# Altium PCB PCB_otel-RFID_2024-05-21.pcbdoc
Units mm, origin at the board's own origin, x right, y up, seen from the top; angles counter-clockwise.
Board outline 77.65 x 69.65 mm, 2 copper layers (Top Layer, Bottom Layer); 33 components, 23 nets, 102 pads, 9 vias.
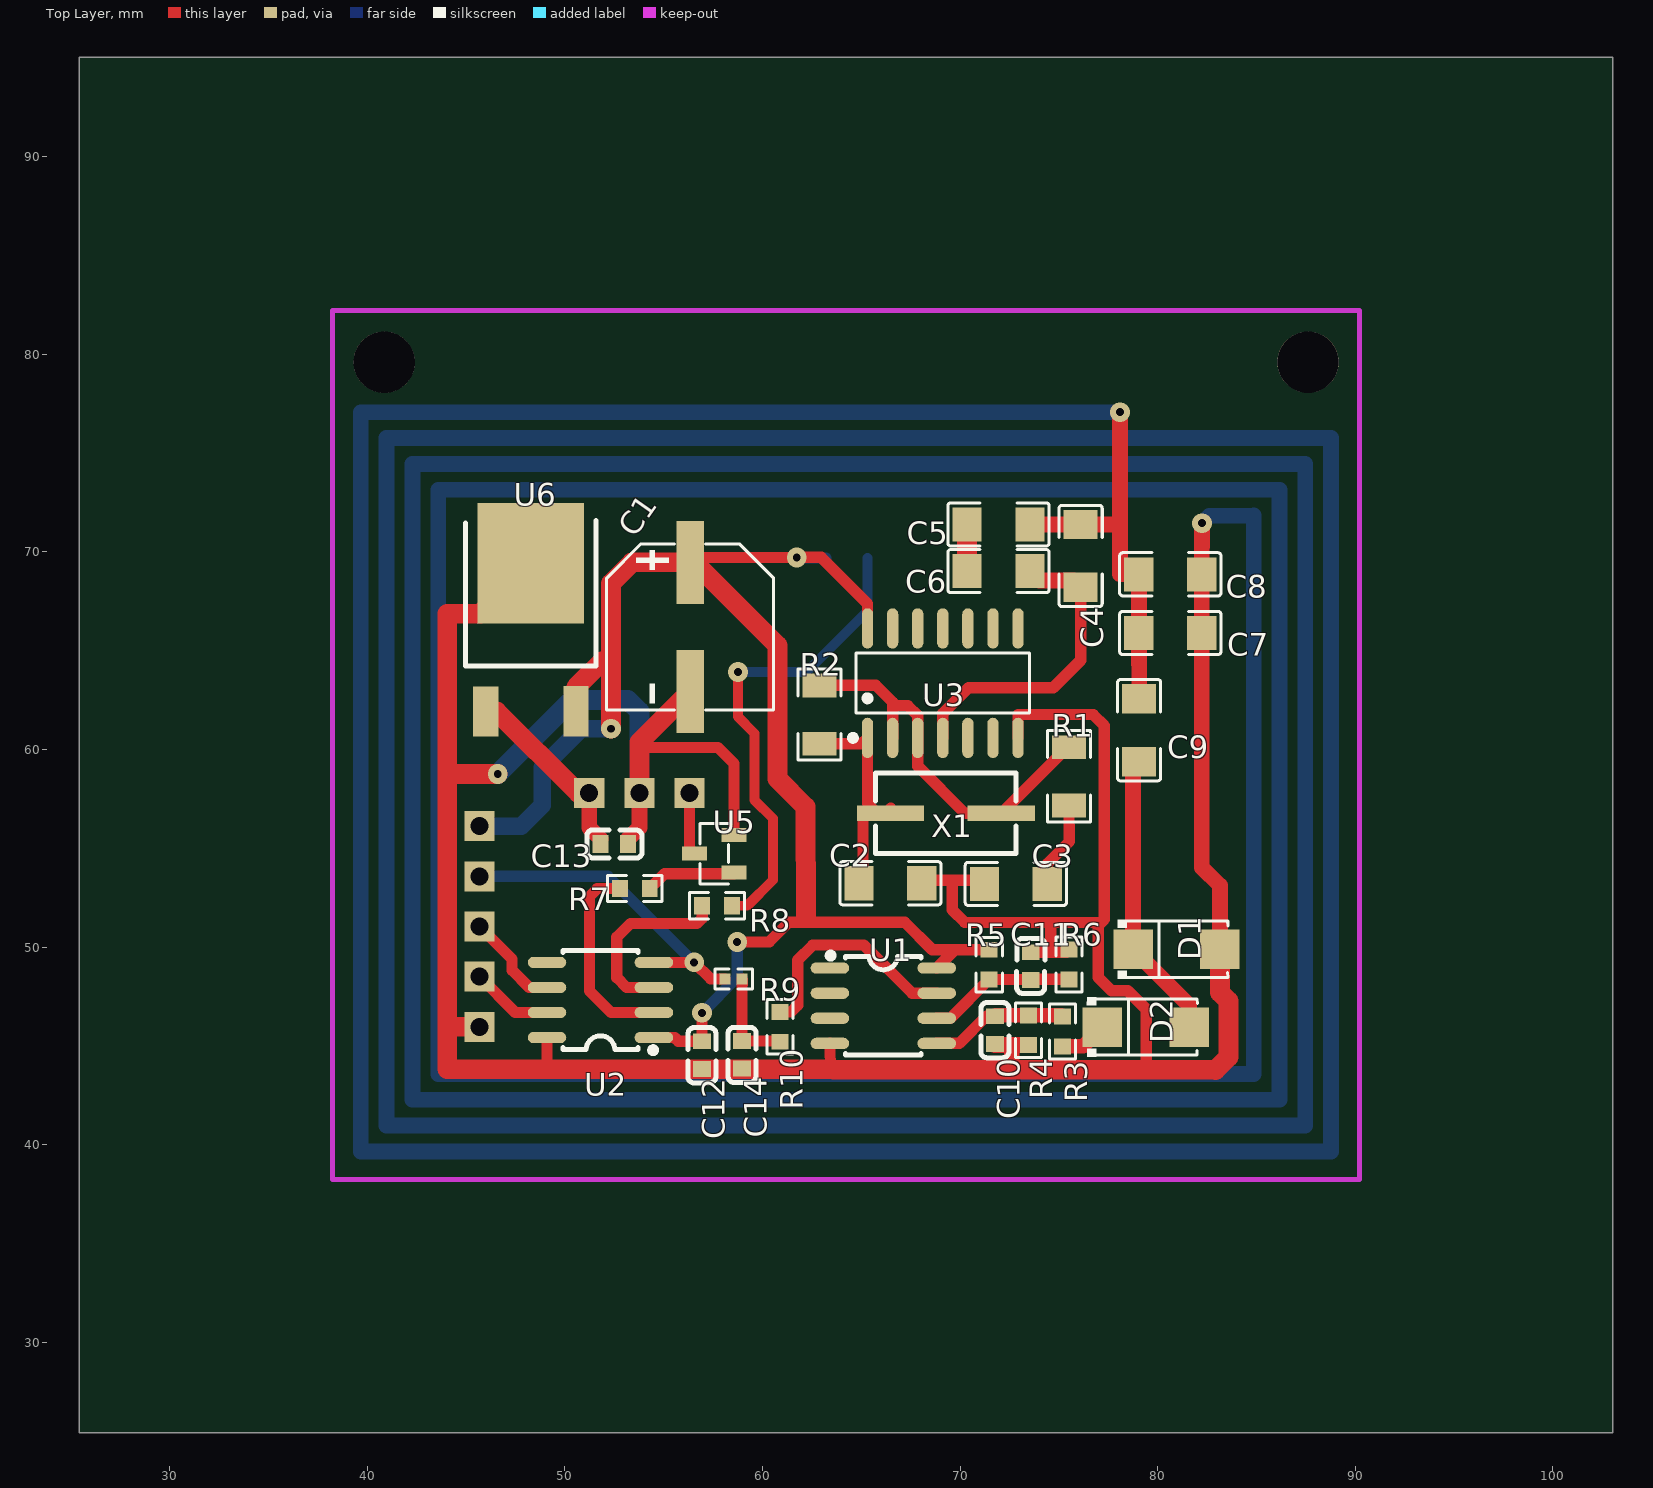
[diagram p0: Top Layer view]
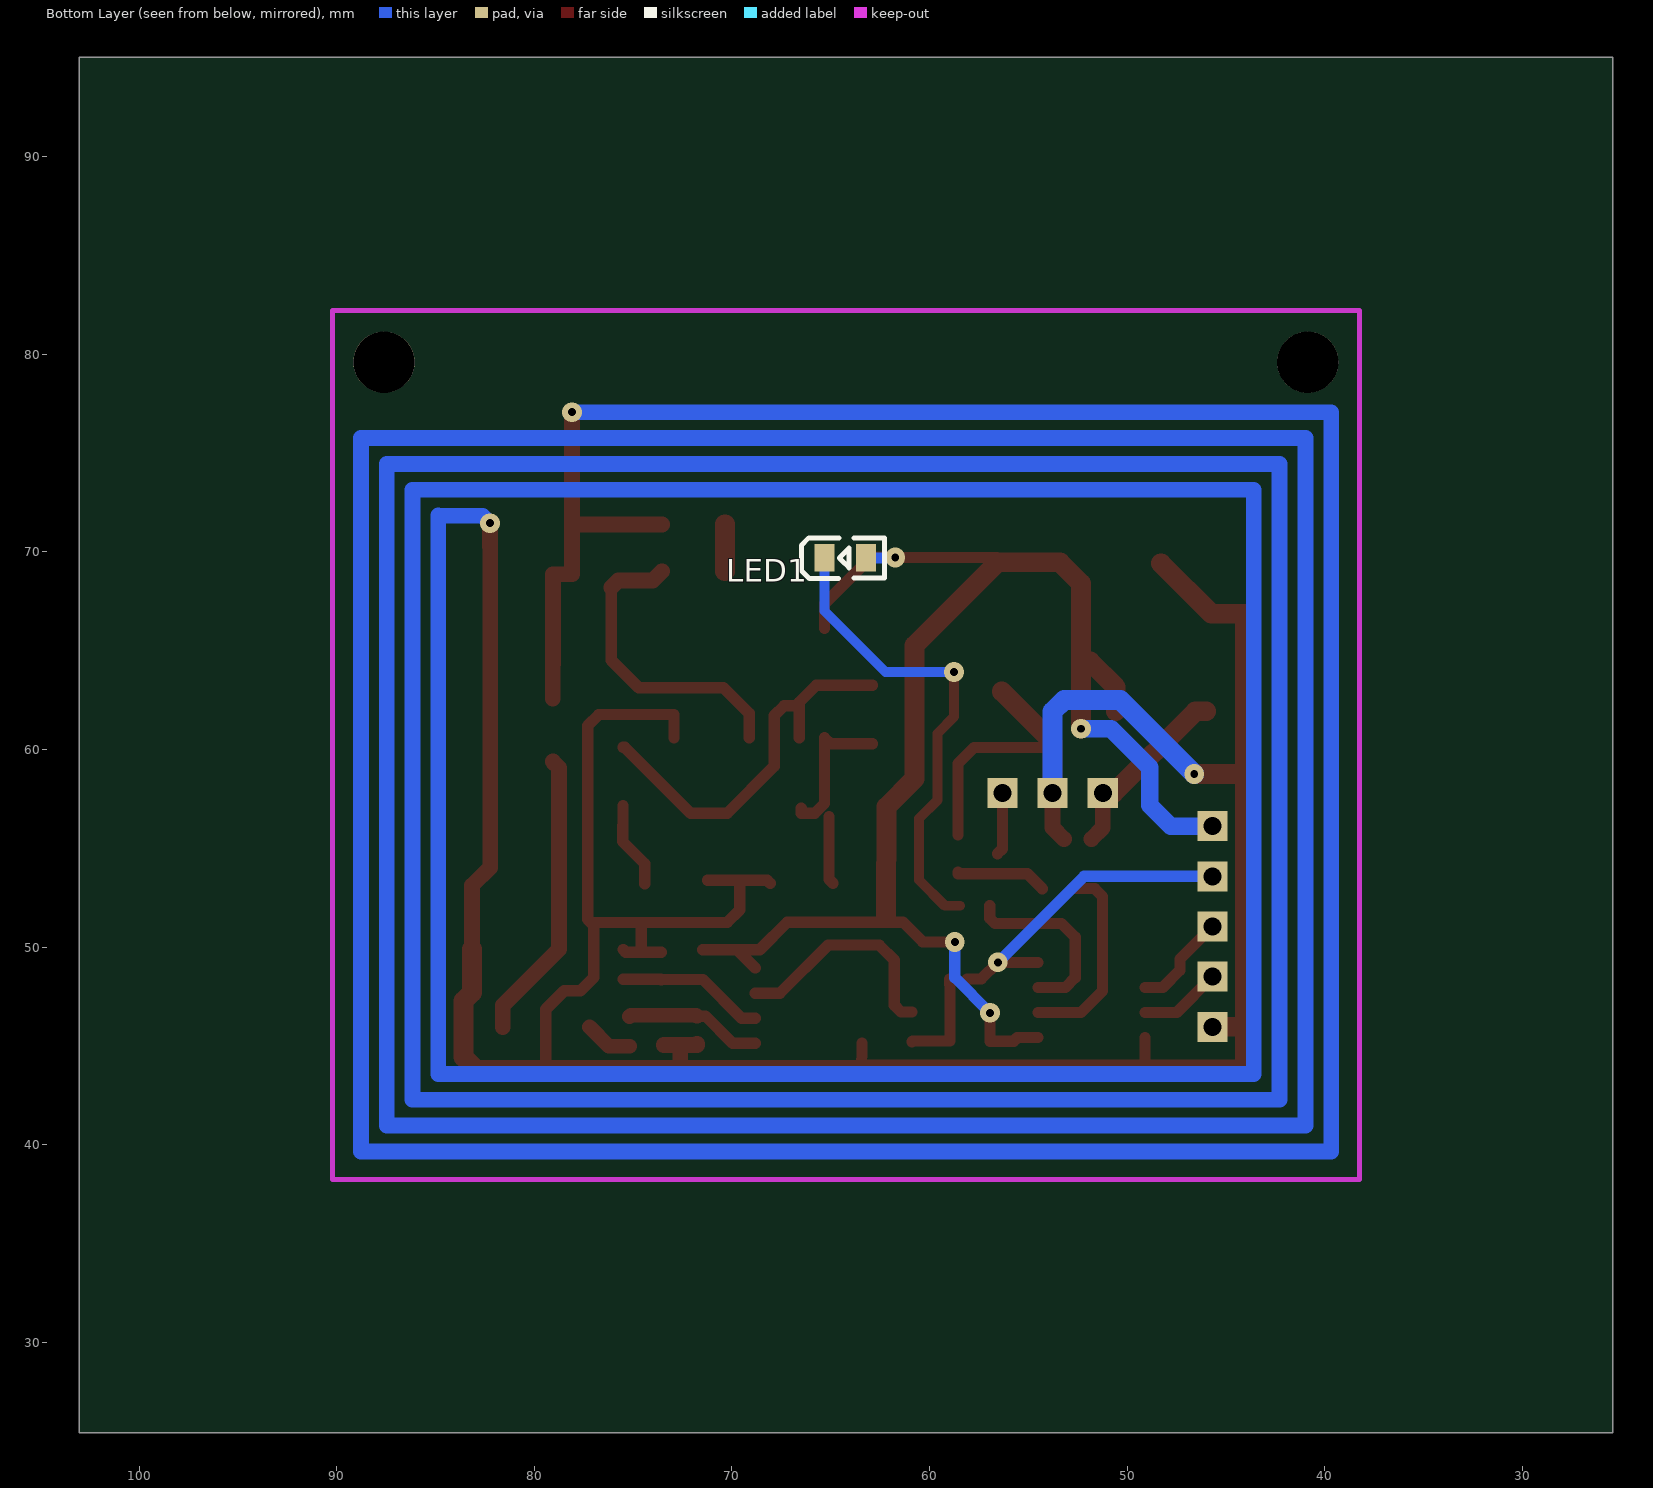
[diagram p1: Bottom Layer view, seen from below]

## Layer stack, top to bottom
Top Layer: signal copper (thickness not stored)
Dielectric: dielectric 0.32, FR-4, Dk 4.8
Bottom Layer: signal copper (thickness not stored)

## Board outline
103.054,25.4 25.4,25.4 25.4,95.054 103.054,95.054

## Components (designator, comment, footprint, x,y, rotation, side; value= is the part's Value field where it differs from the comment)
C1 "470uF" CAP-SMD_BD8.0-L8.3-W8.3-FD 56.337,66.207 r270 top
C2 "22pF" C1206 66.477,53.227 r180 top
C3 "22pF" C1206 72.827,53.197 r0 top
C4 "0.1u" C1206 76.107,69.797 r270 top
C5 "empty" C1206 71.947,71.397 r0 top
C6 "empty" C1206 71.947,69.027 r0 top
C7 "0.1u" C1206 80.647,65.897 r0 top
C8 "0.1u" C1206 80.647,68.867 r0 top
C9 "0.1u" C1206 79.067,60.977 r90 top
C10 "100nF" C0603 71.767,45.797 r90 top
C11 "100nF" C0603 73.577,49.037 r270 top
C12 "100nF" C0603 56.937,44.527 r90 top
C13 "330nF" C0603 52.497,55.217 r180 top
C14 "100nF" C0603 58.967,44.547 r90 top
D1 "M7_C95872" SMA_L4.3-W2.6-LS5.2-RD 80.957,49.887 r0 top
D2 "M7_C95872" SMA_L4.3-W2.6-LS5.2-RD 79.407,45.947 r0 top
LED1 "FC-2012HRK-620D" LED0805-R-RD 64.267,69.697 r0 bottom
R1 "1kΩ" R1206 75.517,58.637 r90 top
R2 "1MΩ" R1206 62.887,61.767 r90 top
R3 "220kΩ" R0603 75.187,45.727 r270 top
R4 "100kΩ" R0603 73.457,45.787 r90 top
R5 "1kΩ" R0603 71.477,49.107 r90 top
R6 "1kΩ" R0603 75.507,49.117 r270 top
R7 "1kΩ" R0603 53.537,52.957 r180 top
R8 "470Ω" R0603 57.697,52.087 r0 top
R9 "JUMPER" R0402 58.537,48.377 r0 top
R10 "1kΩ" R0603 60.887,45.957 r270 top
U1 "LM358DT" SOIC-8_L5.0-W4.0-P1.27-LS6.0-BL 66.117,47.027 r270 top
U2 "PIC12F508-I/SN" SOIC-8_L5.0-W4.0-P1.27-LS6.0-BL 51.797,47.317 r90 top
U3 "74HC04D,653" SOIC-14_L8.7-W3.9-P1.27-LS6.0-BL 69.127,63.357 r0 top
U5 "S8050_C5184427" SOT-23-3_L2.9-W1.3-P1.90-LS2.4-BR 57.557,54.727 r0 top
U6 "L78M05CDT-TR" TO-252-3_L6.5-W5.8-P4.58-BL 48.277,65.677 r0 top
X1 "13.56MHz" CRYSTAL-SMD_L7.0-W4.0-LS7.8 69.287,56.767 r180 top

## Footprints (in the part's own frame and the unit in brackets; to place one, negate y for a bottom-side part, rotate by r counter-clockwise, add the part's x,y. Pads: shape width x height; smd on the part's side, far side on the other; paste and mask are expansions set on the pad)
C0603 [mm]
  rect 0.8x0.9 smd paste+0 mask+0.051: 1(-0.7,0) 2(0.7,0)
  silkscreen extent -1.41,-0.71 1.39,0.72
C1206 [mm]
  rect 1.485x1.728 smd paste-100 mask+0.051: 1(-1.593,0) 2(1.593,0)
  silkscreen extent -2.56,-1.09 2.56,1.09
CAP-SMD_BD8.0-L8.3-W8.3-FD [mm]
  rect 4.2x1.4 smd paste+0 mask+0.051: 1(-3.267,0) 2(3.267,0)
  silkscreen extent -4.2,-4.23 4.2,4.23
CRYSTAL-SMD_L7.0-W4.0-LS7.8 [mm]
  rect 3.4x0.8 smd paste+0 mask+0.05: 1(-2.8,0) 2(2.8,0)
  silkscreen extent -3.56,-2.03 3.56,2.03
LED0805-R-RD [mm]
  rect 1x1.4 smd paste+0 mask+0.051: 1(-1.05,0) 2(1.05,0)
  silkscreen extent -1.99,-1.01 2.22,1.04
R0402 [mm]
  rect 0.566x0.54 smd paste-100 mask+0.051: 1(-0.433,0) 2(0.433,0)
  silkscreen extent -0.94,-0.5 0.94,0.5
R0603 [mm]
  rect 0.806x0.864 smd paste-100 mask+0.051: 1(-0.753,0) 2(0.753,0)
  silkscreen extent -1.39,-0.66 1.39,0.66
R1206 [mm]
  rect 1.208x1.701 smd paste-100 mask+0.051: 1(-1.479,0) 2(1.479,0)
  silkscreen extent -2.31,-1.08 2.31,1.08
SMA_L4.3-W2.6-LS5.2-RD [mm]
  rect 2x2 smd paste+0 mask+0.051: 1(-2.2,0) 2(2.2,0)
  silkscreen extent -2.98,-1.5 2.6,1.5
SOIC-8_L5.0-W4.0-P1.27-LS6.0-BL [mil]
  oval 22.38x76.78 smd paste+0 mask+2: 1(-75,-106.5) 2(-25,-106.5) 3(25,-106.5) 4(75,-106.5) 5(75,106.5) 6(25,106.5) 7(-25,106.5) 8(-75,106.5)
  silkscreen extent -106,-111 98,75
SOIC-14_L8.7-W3.9-P1.27-LS6.0-BL [mm]
  oval 0.574x2.038 smd paste+0 mask+0.051: 1(-3.81,-2.769) 2(-2.54,-2.769) 3(-1.27,-2.769) 4(0,-2.769) 5(1.27,-2.769) 6(2.54,-2.769) 7(3.81,-2.769) 8(3.81,2.769) 9(2.54,2.769) 10(1.27,2.769) 11(0,2.769) 12(-1.27,2.769) 13(-2.54,2.769) 14(-3.81,2.769)
  silkscreen extent -4.7,-2.92 4.4,1.52
SOT-23-3_L2.9-W1.3-P1.90-LS2.4-BR [mm]
  rect 1.25x0.7 smd paste+0 mask+0.051: 1(1,-0.95) 2(1,0.95) 3(-1,0)
  silkscreen extent -0.73,-1.53 0.73,1.53
TO-252-3_L6.5-W5.8-P4.58-BL [mm]
  rect 1.27x2.54 smd paste+0 mask+0.051: 1(-2.288,-3.747) 3(2.288,-3.745)
  rect 5.4x6.1 smd paste+0 mask+0.051: 2(-0.002,3.747)
  silkscreen extent -3.31,-1.46 3.3,5.9

## Free pads (board coordinates)
  rect 1.524x1.524 hole 0.914 paste+0 mask+0.051: 1(45.667,56.117) 1(51.227,57.787) 2(45.667,53.577) 2(53.767,57.787) 3(45.667,51.037) 3(45.667,48.497) 3(45.667,45.957) 3(56.307,57.787)
  round 3.1 hole 3.1 unplated paste+0: ""(40.847,79.607) ""(87.617,79.607)

## Via types
v1: diameter 1, hole 0.4, Top Layer to Bottom Layer, tented both sides, 9 vias

## Nets (pads, with @x,y where several pads share a name; then routed paths per layer and width w, separated by ;. In a path a pad name is that pad's centre, name@x,y a point inside that pad or via, vN(x,y) a via of type N, cw(c..) or ccw(c..) an arc to the next point about the centre after c; other vN are vias at no path point)
+5V: C1.1 C12.2 LED1.1 pad.1@45.667,56.117 R5.2 U1.8 U2.1 U3.14 U6.3 | length 80.5
  Top Layer w0.568: U2.1@54.501,45.412 55.558,45.407 55.738,45.227 C12.2 v1(56.937,46.667) ; v1(58.717,50.257) 60.336,50.257 61.336,51.257 67.196,51.257 68.593,49.86 69.751,49.86 ; U1.8 69.75,49.86 ; R5.2 69.75,49.86
  Top Layer w0.574: 57.057,69.707 v1(61.736,69.724) 62.967,69.728 65.316,67.376 U3.14
  Top Layer w1: U6.3@50.565,61.932 50.565,63.152 51.865,64.452 ; v1(52.327,61.047) 52.327,68.407 53.394,69.474 C1.1 56.55,69.474 60.757,65.268 60.757,58.516 62.177,57.096 62.207,51.547
  Bottom Layer w0.568: v1(56.937,46.667) 58.717,48.447 v1(58.717,50.257) ; v1(61.736,69.724) 61.762,69.697 LED1.1
  Bottom Layer w0.9: pad.1@45.667,56.117 47.787,56.117 48.847,57.177 48.847,59.087 50.807,61.047 v1(52.327,61.047)
C5_1: C5.1 C6.1 | length 2.4
  Top Layer w1: C6.1 C5.1
D1_1: C9.1 D1.1 D2.2 | length 14.7
  Top Layer w0.8: C9.1 78.757,59.075 D1.1 81.607,47.037 D2.2
D2_1: D2.1 R3.2 | length 2.4
  Top Layer w0.75: R3.2 76.233,44.974 D2.1
GND: C1.2 C2.1 C3.1 C4.1 C5.2 C7.1 C7.2 C8.1 C8.2 C9.2 C10.1 C11.1 C12.1 C13.1 C14.1 D1.2 pad.2@53.767,57.787 pad.3@45.667,45.957 R4.1 R6.1 U1.4 U2.8 U3.7 U5.2 U6.2 | length 818.2
  Top Layer w0.568: 49.083,43.746 U2.8@49.091,45.412 ; U1.4 63.437,43.647
  Top Layer w0.574: 53.767,60.101 57.742,60.101 58.557,59.286 U5.2 ; C2.1 68.219,53.377 C3.1@71.234,53.377 ; 69.606,53.377 69.606,51.877 70.247,51.237 77.138,51.237 77.298,51.397 ; U3.7 72.936,61.767 76.736,61.767 77.298,61.206 77.298,51.397 ; C11.1@73.577,49.737 75.374,49.737 R6.1 ; 74.595,49.737 74.595,51.237 ; 79.426,43.647 79.426,46.848 78.487,47.787 77.667,47.787 76.997,48.457 76.997,51.096 77.298,51.397
  Top Layer w0.8: C13.1@53.197,55.467 53.767,56.037 pad.2@53.767,57.787 ; C10.1 71.768,45.034 R4.1 ; 72.583,45.034 72.62,44.996 72.617,43.847 ; C5.2@73.538,71.397 C4.1 78.098,71.384 ; v1(78.097,77.077) 78.097,68.867 C8.1 C7.1 ; C7.1 C9.2 ; C7.2 82.239,54.027 83.157,53.109 D1.2 ; C7.2 C8.2 v1(82.247,71.457)
  Top Layer w1: 44.046,45.957 pad.3@45.667,45.957 ; 44.046,58.758 v1(46.597,58.758) ; U6.2 45.723,66.873 44.046,66.873 44.046,43.827 82.936,43.777 83.587,44.437 83.587,47.267 83.157,47.697 D1.2@83.157,49.887 ; pad.2@53.767,57.787 53.767,60.37 C1.2@56.337,62.94
  Bottom Layer w0.8: v1(78.097,77.077) 39.657,77.076 39.657,39.647 88.776,39.647 88.776,75.768 40.968,75.768 40.968,40.957 87.478,40.957 87.478,74.457 42.276,74.457 42.276,42.268 86.177,42.268 86.177,73.147 43.587,73.147 43.587,43.566 84.867,43.566 84.867,71.846 82.627,71.837 v1(82.247,71.457)
  Bottom Layer w1: v1(46.597,58.758) 50.346,62.507 53.178,62.507 53.767,61.917 pad.2@53.767,57.787
LED1_2: LED1.2 R8.2 | length 24.4
  Top Layer w0.5: R8.2 59.228,52.088 60.526,53.388 60.526,56.497 59.596,57.427 59.596,60.818 58.758,61.658 v1(58.757,63.927)
  Bottom Layer w0.5: v1(58.757,63.927) 62.227,63.927 65.317,67.017 LED1.2@65.317,69.697
PIC6: pad.3@45.667,51.037 U2.6 | length 5
  Top Layer w0.568: pad.3@45.667,51.037 47.317,49.387 47.317,48.827 48.192,47.952 U2.6
PIC7: pad.3@45.667,48.497 U2.7 | length 4.2
  Top Layer w0.568: pad.3@45.667,48.497 47.482,46.682 U2.7
R1_1: C3.2 R1.1 | length 4.4
  Top Layer w0.574: C3.2 74.419,54.219 75.537,55.337 R1.1
R9_2: C14.2 R9.2 R10.2 | length 5.1
  Top Layer w0.568: C14.2 58.966,48.107 58.97,48.111 R9.2 ; C14.2 60.844,45.247 R10.2
RELAY: pad.3@56.307,57.787 U5.3 | length 3.2
  Top Layer w0.574: pad.3@56.307,57.787 56.307,54.977 U5.3@56.557,54.727
S$1126: 
U1_5: C10.2 R3.1 R4.2 U1.5 | length 7
  Top Layer w0.568: U1.5 69.962,45.122 71.337,46.497 C10.2
  Top Layer w0.75: C10.2 71.81,46.54 R4.2 75.127,46.54 R3.1
U1_6: C11.2 R5.1 R6.2 U1.6 | length 7.5
  Top Layer w0.568: U1.6 69.515,46.393 R5.1@71.476,48.354
  Top Layer w0.574: R5.1@71.476,48.354 C11.2 ; C11.2 73.604,48.364 R6.2
U1_7: R10.1 U1.7 | length 11.7
  Top Layer w0.568: R10.1 61.44,46.71 61.786,47.056 61.786,49.347 62.548,50.106 65.126,50.106 67.572,47.663 U1.7
U2_2: R7.2 U2.2 | length 10.2
  Top Layer w0.568: R7.2 51.637,52.957 51.237,52.557 51.237,47.777 52.332,46.682 U2.2
U2_3: R8.1 U2.3 | length 9.5
  Top Layer w0.568: U2.3@54.501,47.952 53.117,47.957 52.627,48.448 52.627,50.508 53.317,51.196 56.685,51.196 56.945,51.453 R8.1
U2_4: pad.2@45.667,53.577 R9.1 U2.4 | length 16.6
  Top Layer w0.568: U2.4 v1(56.539,49.222) 57.384,48.377 R9.1
  Bottom Layer w0.568: pad.2@45.667,53.577 52.184,53.577 v1(56.539,49.222)
U3_1: C2.2 R2.1 U3.1 X1.2 | length 11
  Top Layer w0.574: R2.1 65.017,60.288 65.317,60.588 65.317,57.267 65.817,56.767 X1.2 X1.2@66.487,57.026 ; C2.2 65.087,53.429 X1.2@65.087,56.607
U3_2: R1.2 R2.2 U3.2 U3.3 X1.1 | length 20
  Top Layer w0.574: R2.2 65.738,63.246 66.587,62.397 ; U3.2@66.587,60.588 66.587,62.397 ; U3.3 67.856,59.156 70.246,56.766 X1.1 ; U3.3@67.857,60.588 67.857,61.717 67.367,62.207 66.777,62.207 66.587,62.397 ; X1.1 75.436,60.116 R1.2
U3_4: C4.2 C6.2 U3.4 | length 15.9
  Top Layer w0.574: U3.4@69.127,60.588 69.127,61.827 70.427,63.127 74.717,63.127 76.107,64.517 C4.2
  Top Layer w0.8: C6.2@73.538,69.027 74.008,68.557 75.753,68.557 C4.2
U5_1: R7.1 U5.1 | length 4.6
  Top Layer w0.574: R7.1 55.041,53.707 58.557,53.707 U5.1
U6_1: C13.2 pad.1@51.227,57.787 U6.1 | length 9.5
  Top Layer w0.8: pad.1@51.227,57.787 51.227,56.037 C13.2@51.797,55.467
  Top Layer w1: U6.1 46.533,61.93 50.676,57.787 pad.1@51.227,57.787
pads on no net: U1.1 U1.2 U1.3 U2.5 U3.5 U3.6 U3.8 U3.9 U3.10 U3.11 U3.12 U3.13

## Other copper
Top Layer:
  rectangle net +5V: 56.512,69.432 57.182,70.002